# EAGLE board iPodGuitarAmp (EAGLE 8.2.2)
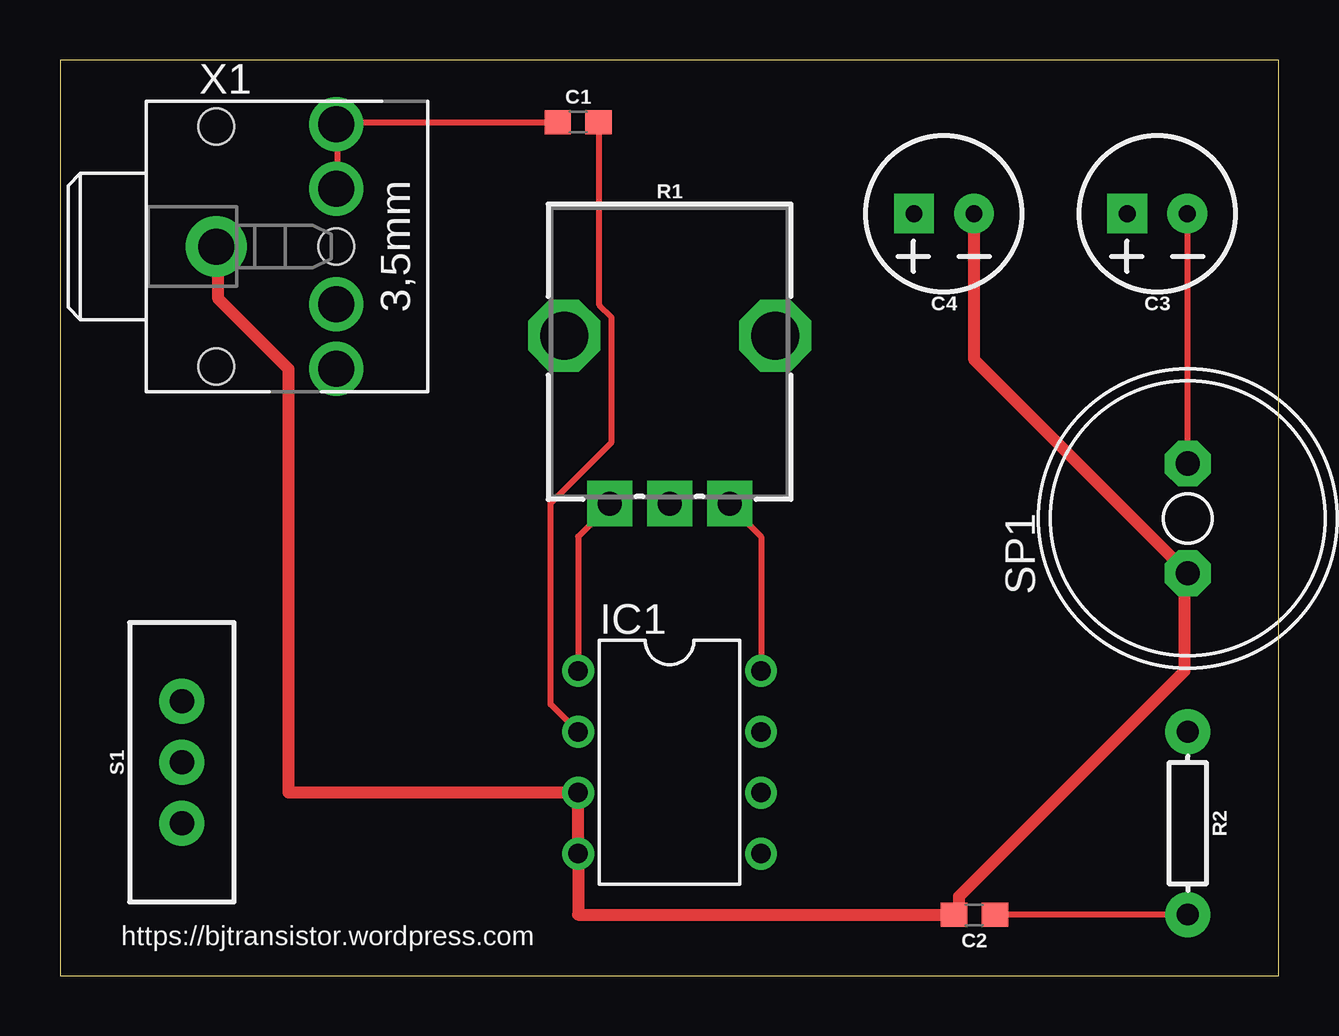
[diagram p0: board, top side]
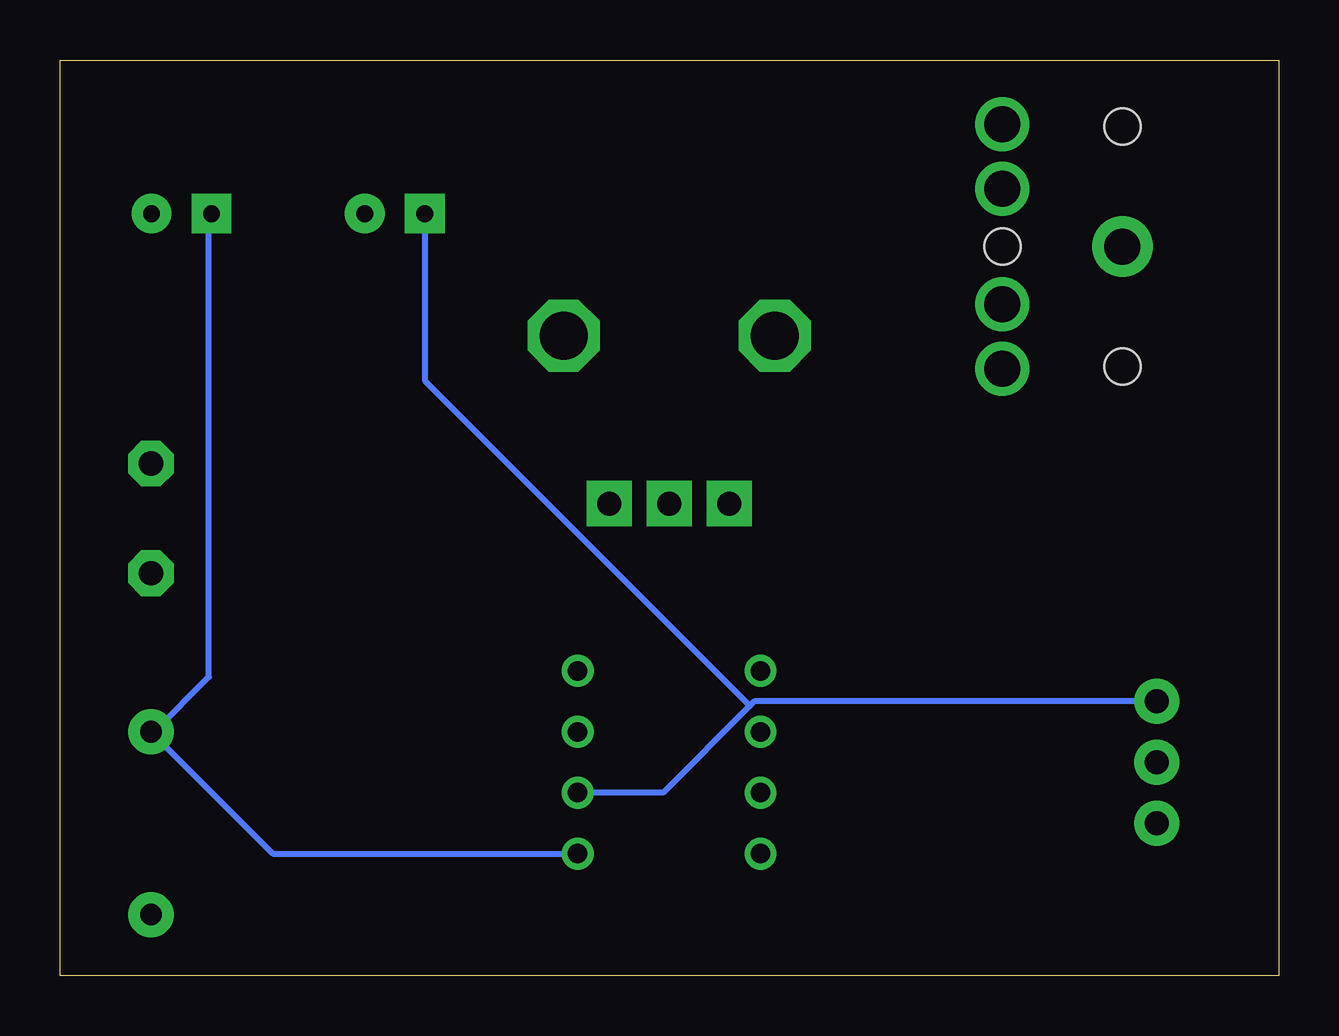
[diagram p1: board, bottom side, seen from below]

Size 50.78 x 38.15 mm. Coordinates in mm from the lower left corner, seen from the top.
Outline: 0,0 50.78,0 50.78,38.15 0,38.15 0,0
Copper layers (1*16): Top 0.035mm / dielectric 1.5mm / Bottom 0.035mm
Design rules "default": minimum track width 6mil, minimum drill 0.35mm, track to track 6mil, track to pad 6mil, pad to pad 6mil, via to via 6mil, smd to smd 6mil, copper to edge 40mil, drill to drill 6mil, minimum pad ring 10mil, minimum via ring 8mil, stop-mask expansion 4mil, vias tented up to drill 0mil, thermal gap 10mil
Net classes: 0 default: width 0.254 mm, clearance 0.254 mm; 1 supply: width 0.508 mm, clearance 0.508 mm

## Footprints (pad centres in the part's own frame; a part is rotated, then mirrored left to right if it is on the bottom)
0603 = smd 1.1 x 1: 1 -0.85,0; 2 0.85,0
CPOL-RADIAL-2.5MM-6.5MM = drill 0.7 pad 1.651 square: 1 1.25,0 | drill 0.7 pad 1.651: 2 -1.25,0
DIL08 = drill 0.813 pad 1.27: 1 -3.81,-3.81; 2 -1.27,-3.81; 3 1.27,-3.81; 4 3.81,-3.81; 5 3.81,3.81; 6 1.27,3.81; 7 -1.27,3.81; 8 -3.81,3.81
POT-PTH-ALPS = drill 1 pad 1.88 square: P$1 7,-2.5; P$2 7,0; P$3 7,2.5 | drill 2 octagon: P$4 0,-4.4; P$5 0,4.4
AXIAL-0.3 = drill 0.9 pad 1.88: P$1 -3.81,0; P$2 3.81,0
SWITCH_SPDT_PTH_11.6X4.0MM = drill 1.016 pad 1.88: 1 0,2.54; 2 0,0; 3 0,-2.54
AL11P = drill 1.016 pad 1.905 octagon: + 2.286,0; - -2.286,0
STX3100 = drill 1.5 pad 2.54: 1 2.7,-0.1 | drill 1.5: 2 7.7,5; 3 7.7,2.3; 4 7.7,-2.5; 5 7.7,-5.2 | hole 1.5: 2.7,4.9; 2.7,-5.1; 7.7,-0.1

## Placement (x,y rotation side)
C1  0.1uF  [0603]  21.59,35.56 0 top
C2  47nF  [0603]  38.1,2.54 180 top
C3  100uF  [CPOL-RADIAL-2.5MM-6.5MM]  45.72,31.75 180 top
C4  100uF  [CPOL-RADIAL-2.5MM-6.5MM]  36.83,31.75 180 top
IC1  LM386N-1  [DIL08]  25.4,8.89 270 top
R1  10k  [POT-PTH-ALPS]  25.4,26.67 270 top
R2  10  [AXIAL-0.3]  46.99,6.35 270 top
S1  [SWITCH_SPDT_PTH_11.6X4.0MM]  5.08,8.89 0 top
SP1  SPEAKER/AL11P  [AL11P]  46.99,19.05 90 top
X1  STEREOJACK  [STX3100]  3.81,30.48 0 top

## Library data of the parts
C1 = SparkFun-Capacitors; PROD_ID: CAP-08604
C2 = SparkFun-Capacitors; PROD_ID: CAP-08605
C3 C4 = SparkFun-Capacitors; PROD_ID: CAP-08439
IC1 = linear
R1 = SparkFun-Resistors; PROD_ID: RES-09177; SF_SKU: COM-09288
R2 = SparkFun-Resistors; PROD_ID: RES-12180
S1 = SparkFun-Switches; PROD_ID: SWCH-08261; SF_SKU: COM-00102
SP1 X1 = adafruit

## Nets
GND [supply]: C2.2 C4.2 IC1.3 IC1.4 SP1.- X1.1
N$1: C3.1 IC1.5 R2.P$1
N$2: C2.1 R2.P$2
N$3: C3.2 SP1.+
N$4: C1.2 IC1.2
N$5: C1.1 X1.2 X1.3
N$6: C4.1 IC1.6 S1.1
N$7: IC1.1 R1.P$1
N$8: IC1.8 R1.P$3
V+ [supply]: S1.2

## Tracks (layer width: path | path; a pad name or v marks a point on that pad's centre or on a via)
GND
  Top 0.508: C4.2 38.1,31.75 38.1,25.65 SP1.- 46.86,16.64 46.86,12.7 37.47,3.3 37.47,2.67 C2.2 21.59,2.54 IC1.4 IC1.3 9.53,7.62 9.53,25.27 6.6,28.19 6.6,30.35 X1.1
N$1
  Bottom 0.254: IC1.5 41.91,5.08 R2.P$1 46.86,10.16 44.58,12.45 44.58,31.75 C3.1
N$2
  Top 0.254: R2.P$2 C2.1
N$3
  Top 0.254: SP1.+ 46.99,31.75 C3.2
N$4
  Top 0.254: IC1.2 20.45,11.3 20.45,19.68 22.99,22.23 22.99,27.43 22.48,27.94 22.48,35.56 C1.2
N$5
  Top 0.254: C1.1 11.56,35.56 X1.2 11.56,35.43 11.56,32.89 X1.3
N$6
  Bottom 0.254: IC1.6 25.65,7.62 22.04,11.24 | 22.04,11.24 21.84,11.43 S1.1 | 22.04,11.24 35.56,24.77 35.56,31.75 C4.1
N$7
  Top 0.254: IC1.1 21.59,18.29 22.86,19.56 R1.P$1
N$8
  Top 0.254: IC1.8 29.21,18.29 27.94,19.56 R1.P$3

## Text on the board
tPlace: https://bjtransistor.wordpress.com